# EAGLE board 0606_RGB_Clock (EAGLE 5.11)
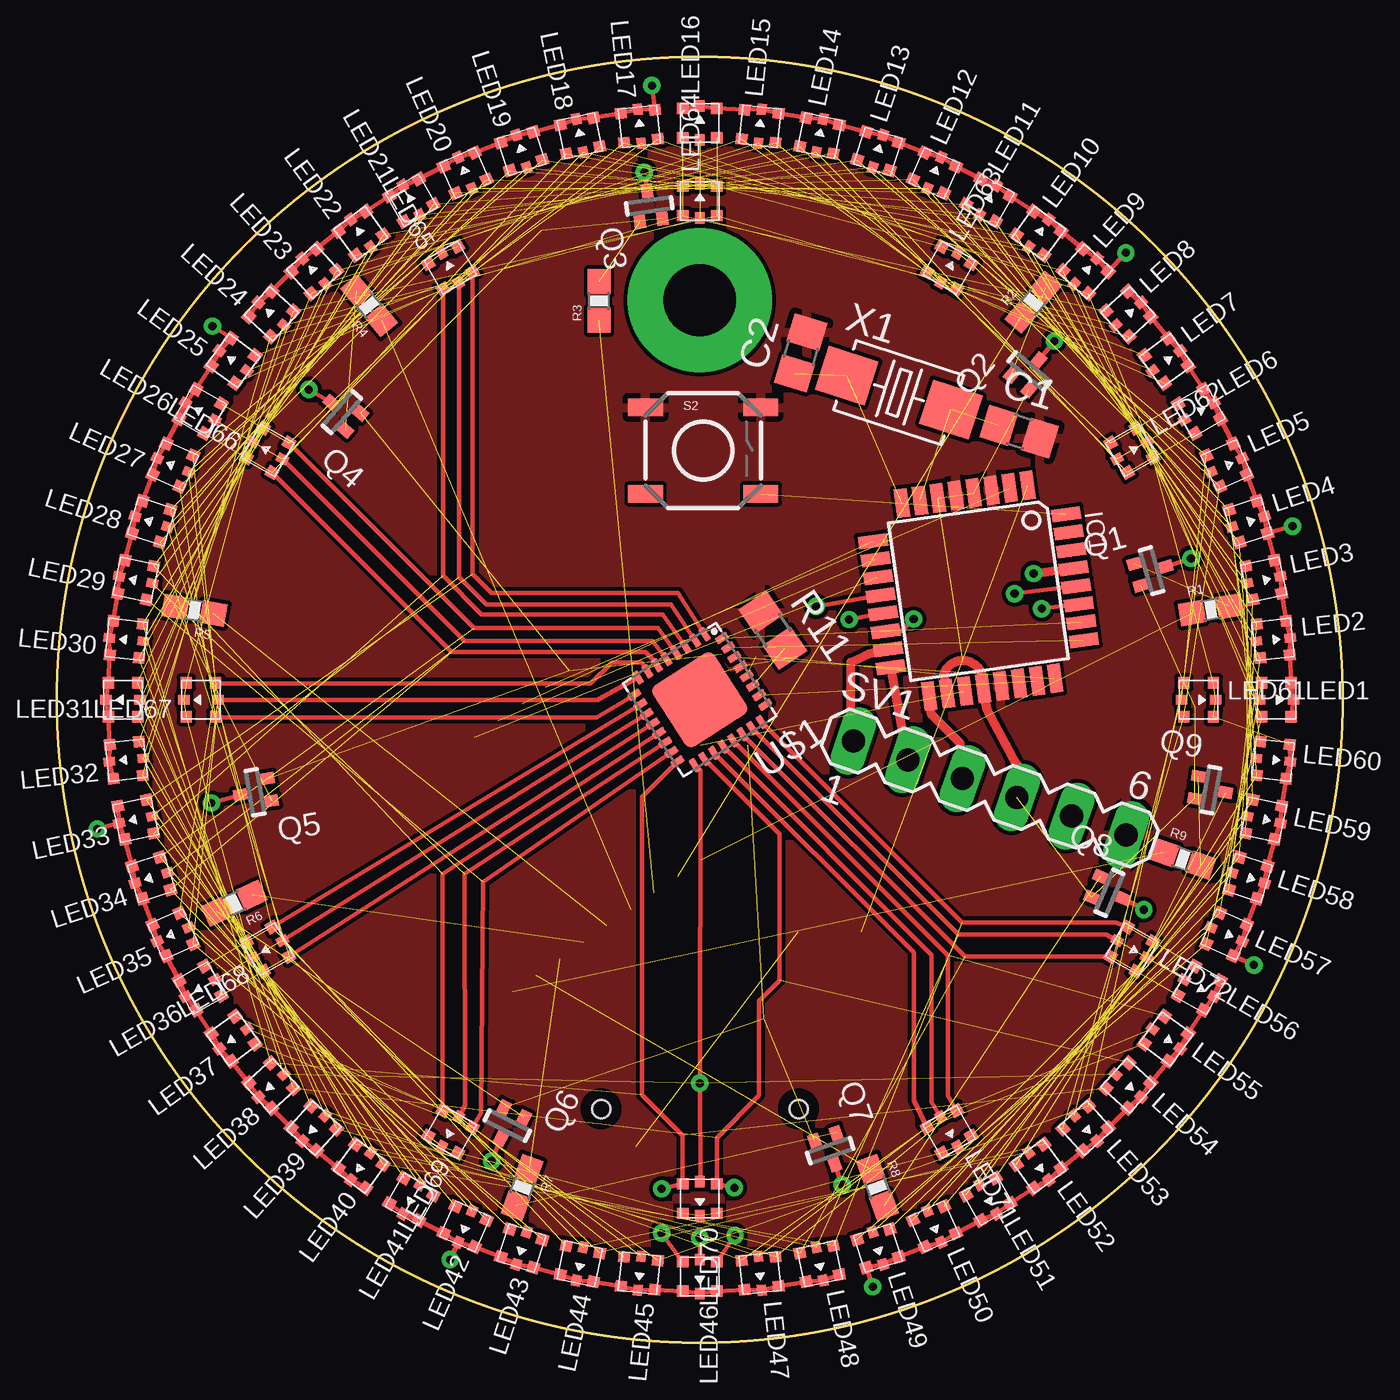
[diagram p0: board, top side]
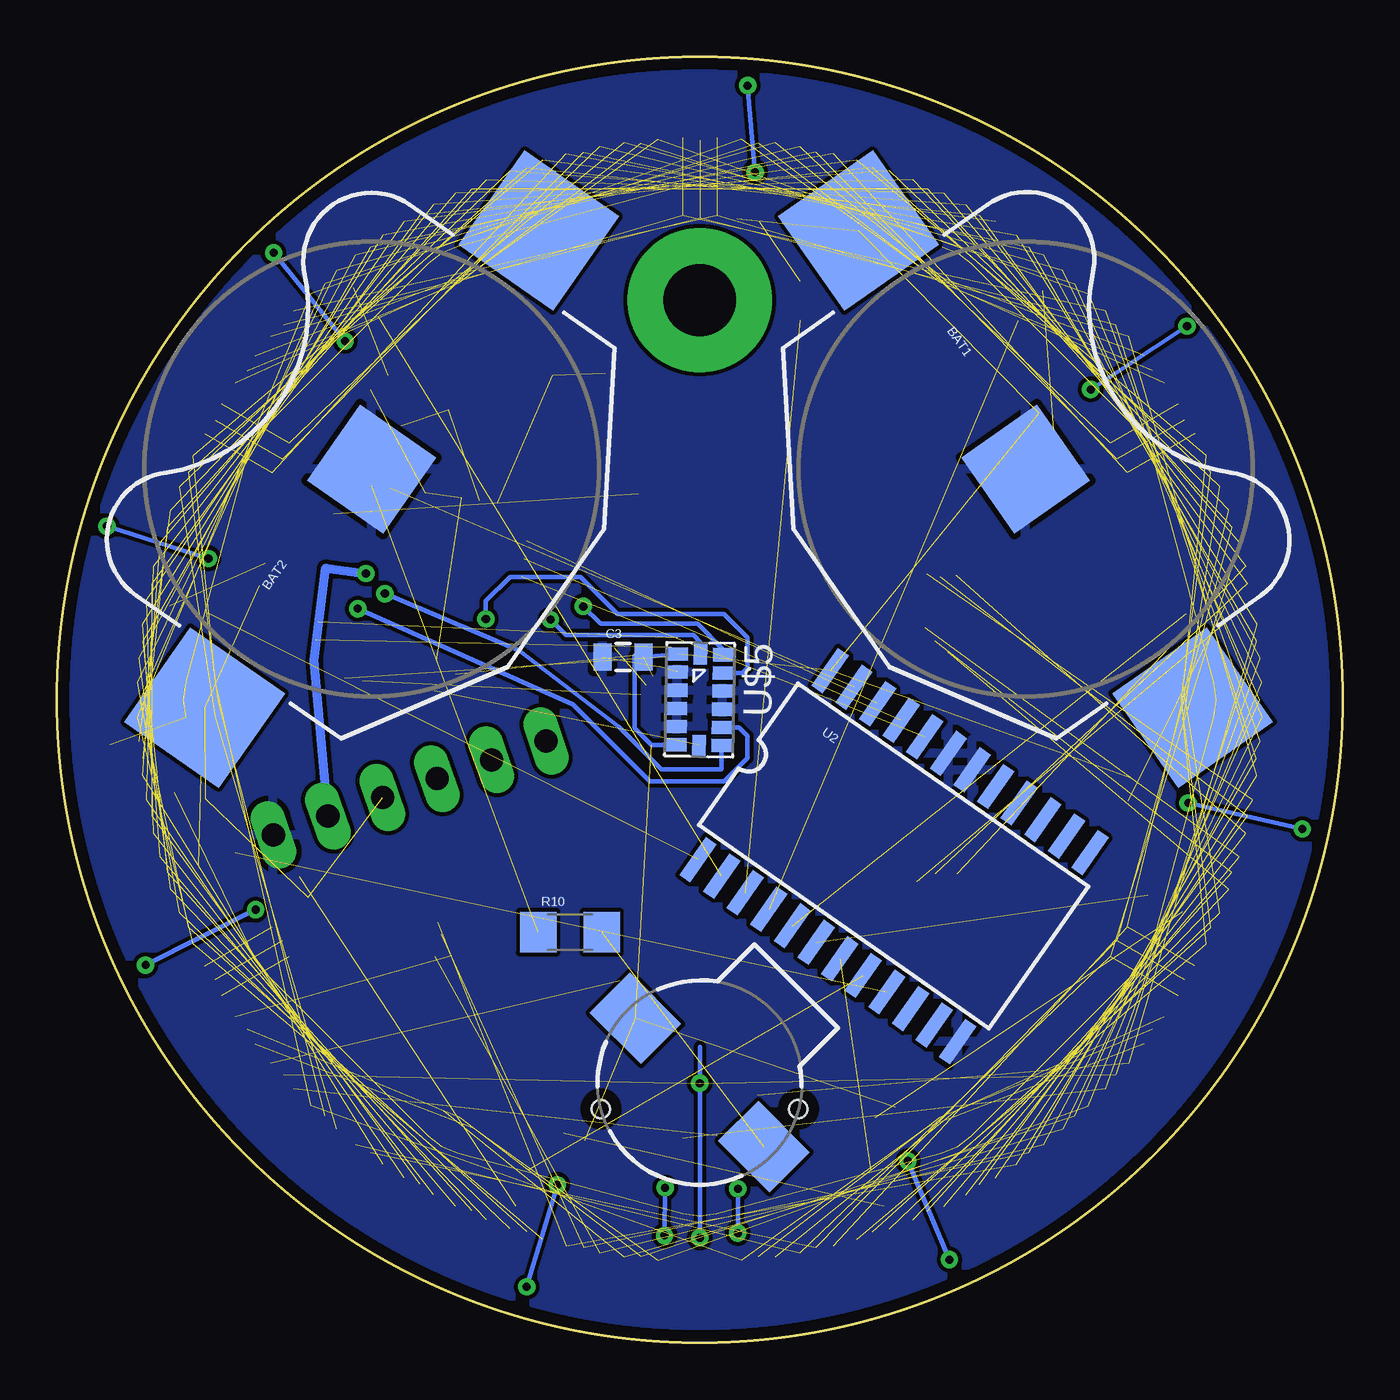
[diagram p1: board, bottom side, seen from below]

Size 56.64 x 56.64 mm. Coordinates in mm from the lower left corner, seen from the top.
Outline: circle at 28.32,28.32 radius 28.32
Copper layers (1*16): Top 0.0356mm / dielectric 1.5011mm / Bottom 0.0356mm
Design rules "SilverCircuits": minimum track width 7mil, minimum drill 14mil, track to track 7mil, track to pad 7mil, pad to pad 7mil, via to via 7mil, smd to smd 0mil, copper to edge 20mil, drill to drill 8mil, minimum pad ring 10mil, minimum via ring 8mil, stop-mask expansion 4mil, vias tented up to drill 0mil, thermal gap 10mil
Net classes: 0 default: width 0.254 mm

## Footprints (pad centres in the part's own frame; a part is rotated, then mirrored left to right if it is on the bottom)
BATTCON_20MM = smd 5.08 x 5.08: 1 -12.827,0; 3 12.827,0 | smd 4.064 x 4.064: 2 0,0
C0805 = smd 1.3 x 1.5: 1 -0.95,0; 2 0.95,0
0805 = smd 0.8 x 1.2: 1 -0.9,0; 2 0.9,0
TQFP32-08 = smd 1.27 x 0.559: 1 -4.293,2.8; 2 -4.293,2; 3 -4.293,1.2; 4 -4.293,0.4; 5 -4.293,-0.4; 6 -4.293,-1.2; 7 -4.293,-2; 8 -4.293,-2.8; 17 4.293,-2.8; 18 4.293,-2; 19 4.293,-1.2; 20 4.293,-0.4; 21 4.293,0.4; 22 4.293,1.2; 23 4.293,2; 24 4.293,2.8 | smd 0.559 x 1.27: 9 -2.8,-4.293; 10 -2,-4.293; 11 -1.2,-4.293; 12 -0.4,-4.293; 13 0.4,-4.293; 14 1.2,-4.293; 15 2,-4.293; 16 2.8,-4.293; 25 2.8,4.293; 26 2,4.293; 27 1.2,4.293; 28 0.4,4.293; 29 -0.4,4.293; 30 -1.2,4.293; 31 -2,4.293; 32 -2.8,4.293
0606_LED = smd 0.5 x 0.5: P$1 -0.75,-0.65; P$3 0.75,-0.65; P$4 0.75,0.65; P$6 -0.75,0.65 | smd 0.4 x 0.5: P$2 0,-0.75; P$5 0,0.75
SOT416 = smd 0.6 x 0.5: 1 -0.65,0; 2 0.65,-0.5; 3 0.65,0.5
SPARKFUN_0603-RES = smd 1.1 x 1: 1 -0.85,0; 2 0.85,0
1206 = smd 1.6 x 1.8: 1 -1.4,0; 2 1.4,0
R0805 = smd 1.3 x 1.5: 1 -0.95,0; 2 0.95,0
TACTILE_SWITCH_SMD = smd 1.524 x 0.762: 1 -2.54,1.905; 2 2.54,1.905; 3 -2.54,-1.905; 4 2.54,-1.905
BUZZER-CCV = smd 3.2 x 2.5: + 4,0; - -4,0 | hole 0.8: -3.9,-2.25; 2.25,3.9
MA06-1 = drill 1.016 long: 1 -6.35,0; 2 -3.81,0; 3 -1.27,0; 4 1.27,0; 5 3.81,0; 6 6.35,0
SO-24DW = smd 0.584 x 2.032: 1 -6.35,-5.08; 2 -5.08,-5.08; 3 -3.81,-5.08; 4 -2.54,-5.08; 5 -1.27,-5.08; 6 0,-5.08; 7 1.27,-5.08; 8 2.54,-5.08; 9 3.81,-5.08; 10 5.08,-5.08; 11 6.35,-5.08; 12 7.62,-5.08; 13 7.62,5.08; 14 6.35,5.08; 15 5.08,5.08; 16 3.81,5.08; 17 2.54,5.08; 18 1.27,5.08; 19 0,5.08; 20 -1.27,5.08; 21 -2.54,5.08; 22 -3.81,5.08; 23 -5.08,5.08; 24 -6.35,5.08
QFN32 = smd 0.3 x 0.6: 1 -1.75,-2.3; 2 -1.25,-2.3; 3 -0.75,-2.3; 4 -0.25,-2.3; 5 0.25,-2.3; 6 0.75,-2.3; 7 1.25,-2.3; 8 1.75,-2.3; 17 1.75,2.3; 18 1.25,2.3; 19 0.75,2.3; 20 0.25,2.3; 21 -0.25,2.3; 22 -0.75,2.3; 23 -1.25,2.3; 24 -1.75,2.3 | smd 0.6 x 0.3: 9 2.3,-1.75; 10 2.3,-1.25; 11 2.3,-0.75; 12 2.3,-0.25; 13 2.3,0.25; 14 2.3,0.75; 15 2.3,1.25; 16 2.3,1.75; 25 -2.3,1.75; 26 -2.3,1.25; 27 -2.3,0.75; 28 -2.3,0.25; 29 -2.3,-0.25; 30 -2.3,-0.75; 31 -2.3,-1.25; 32 -2.3,-1.75 | smd 3.2 x 3.2: EXP 0,0
LGA-14 = smd 0.6 x 0.9: 1 -2,-1; 2 -1.2,-1; 3 -0.4,-1; 4 0.4,-1; 5 1.2,-1; 6 2,-1; 8 2,1; 9 1.2,1; 10 0.4,1; 11 -0.4,1; 12 -1.2,1; 13 -2,1 | smd 0.9 x 0.6: 7 2,0; 14 -2,0
5032 = smd 2.286 x 2.032: 1 -2.413,0; 2 2.413,0

## Placement (x,y rotation side)
BAT1  [BATTCON_20MM]  13.97,38.48 305 bottom
BAT2  [BATTCON_20MM]  42.77,38.48 55 bottom
C1  [C0805]  42.39,40.13 343 top
C2  [C0805]  32.77,43.6 73 top
C3  [0805]  31.7,30.2 0 bottom
IC1  MEGA8-AI  [TQFP32-08]  40.6,33.12 278 top
LED1  [0606_LED]  53.72,28.32 270 top
LED2  [0606_LED]  53.58,30.98 276 top
LED3  [0606_LED]  53.16,33.6 282 top
LED4  [0606_LED]  52.48,36.17 288 top
LED5  [0606_LED]  51.52,38.65 294 top
LED6  [0606_LED]  50.32,41.02 300 top
LED7  [0606_LED]  48.87,43.25 306 top
LED8  [0606_LED]  47.2,45.32 312 top
LED9  [0606_LED]  45.32,47.2 318 top
LED10  [0606_LED]  43.25,48.87 324 top
LED11  [0606_LED]  41.02,50.32 330 top
LED12  [0606_LED]  38.65,51.52 336 top
LED13  [0606_LED]  36.17,52.48 342 top
LED14  [0606_LED]  33.6,53.16 348 top
LED15  [0606_LED]  30.98,53.58 354 top
LED16  [0606_LED]  28.32,53.72 0 top
LED17  [0606_LED]  25.67,53.58 6 top
LED18  [0606_LED]  23.04,53.16 12 top
LED19  [0606_LED]  20.47,52.48 18 top
LED20  [0606_LED]  17.99,51.52 24 top
LED21  [0606_LED]  15.62,50.32 30 top
LED22  [0606_LED]  13.39,48.87 36 top
LED23  [0606_LED]  11.33,47.2 42 top
LED24  [0606_LED]  9.45,45.32 48 top
LED25  [0606_LED]  7.77,43.25 54 top
LED26  [0606_LED]  6.32,41.02 60 top
LED27  [0606_LED]  5.12,38.65 66 top
LED28  [0606_LED]  4.16,36.17 72 top
LED29  [0606_LED]  3.48,33.6 78 top
LED30  [0606_LED]  3.06,30.98 84 top
LED31  [0606_LED]  2.92,28.32 90 top
LED32  [0606_LED]  3.06,25.67 96 top
LED33  [0606_LED]  3.48,23.04 102 top
LED34  [0606_LED]  4.16,20.47 108 top
LED35  [0606_LED]  5.12,17.99 114 top
LED36  [0606_LED]  6.32,15.62 120 top
LED37  [0606_LED]  7.77,13.39 126 top
LED38  [0606_LED]  9.45,11.33 132 top
LED39  [0606_LED]  11.33,9.45 138 top
LED40  [0606_LED]  13.39,7.77 144 top
LED41  [0606_LED]  15.62,6.32 150 top
LED42  [0606_LED]  17.99,5.12 156 top
LED43  [0606_LED]  20.47,4.16 162 top
LED44  [0606_LED]  23.04,3.48 168 top
LED45  [0606_LED]  25.67,3.06 174 top
LED46  [0606_LED]  28.32,2.92 180 top
LED47  [0606_LED]  30.98,3.06 186 top
LED48  [0606_LED]  33.6,3.48 192 top
LED49  [0606_LED]  36.17,4.16 198 top
LED50  [0606_LED]  38.65,5.12 204 top
LED51  [0606_LED]  41.02,6.32 210 top
LED52  [0606_LED]  43.25,7.77 216 top
LED53  [0606_LED]  45.32,9.45 222 top
LED54  [0606_LED]  47.2,11.33 228 top
LED55  [0606_LED]  48.87,13.39 234 top
LED56  [0606_LED]  50.32,15.62 240 top
LED57  [0606_LED]  51.52,17.99 246 top
LED58  [0606_LED]  52.48,20.47 252 top
LED59  [0606_LED]  53.16,23.04 258 top
LED60  [0606_LED]  53.58,25.67 264 top
LED61  [0606_LED]  50.29,28.32 270 top
LED62  [0606_LED]  47.35,39.31 300 top
LED63  [0606_LED]  39.31,47.35 330 top
LED64  [0606_LED]  28.32,50.29 0 top
LED65  [0606_LED]  17.34,47.35 30 top
LED66  [0606_LED]  9.29,39.31 60 top
LED67  [0606_LED]  6.35,28.32 90 top
LED68  [0606_LED]  9.29,17.34 120 top
LED69  [0606_LED]  17.34,9.29 150 top
LED70  [0606_LED]  28.32,6.35 180 top
LED71  [0606_LED]  39.31,9.29 210 top
LED72  [0606_LED]  47.35,17.34 240 top
Q1  BC857AT115  [SOT416]  48.22,34.01 196 top
Q2  BC857AT115  [SOT416]  42.84,42.79 230 top
Q3  BC857AT115  [SOT416]  26.09,50.08 278 top
Q4  BC857AT115  [SOT416]  12.56,41 319 top
Q5  BC857AT115  [SOT416]  8.73,24.25 10 top
Q6  BC857AT115  [SOT416]  19.85,9.57 63 top
Q7  BC857AT115  [SOT416]  34.06,8.46 109 top
Q8  BC857AT115  [SOT416]  46.37,19.83 157 top
Q9  BC857AT115  [SOT416]  50.83,24.35 170 top
R1  620  [SPARKFUN_0603-RES]  50.83,32.29 10 top
R2  620  [SPARKFUN_0603-RES]  43.01,45.83 50 top
R3  620  [SPARKFUN_0603-RES]  23.89,45.88 90 top
R4  620  [SPARKFUN_0603-RES]  13.75,45.68 130 top
R5  620  [SPARKFUN_0603-RES]  6.06,32.27 170 top
R6  620  [SPARKFUN_0603-RES]  7.81,19.35 205 top
R7  620  [SPARKFUN_0603-RES]  20.5,6.84 250 top
R8  620  [SPARKFUN_0603-RES]  36.14,6.84 290 top
R9  620  [SPARKFUN_0603-RES]  49.59,21.31 341 top
R10  [1206]  34.04,18.08 0 bottom
R11  [R0805]  31.54,31.38 304 top
S2  [TACTILE_SWITCH_SMD]  28.47,39.29 0 top
SG1  [BUZZER-CCV]  28.32,11.46 135 bottom
SV1  [MA06-1]  41.1,24.43 341 top
U2  CD74HC154M  [SO-24DW]  20.28,21.8 325 bottom
U$1  TLC5947  [QFN32]  28.32,28.32 213 top
U$5  MMA7455L  [LGA-14]  28.32,28.32 269 bottom
X1  [5032]  37.09,41.85 342 top

## Library data of the parts
BAT1 BAT2 C3 R10 S2 SG1 U2 = SparkFun
C1 C2 R11 = rcl
IC1 = atmel
LED1-LED72 U$1 = lil_rgb
Q1-Q9 = zetex
R1-R9 = Nullspace
SV1 = NSL
U$5 = MMA7455Lbreakoutboard-v1a
X1 = NSL_MiniQuad

## Nets
!CS: IC1.19 U$5.7
COL1: LED1.P$1 LED9.P$1 LED17.P$1 LED25.P$1 LED33.P$1 LED41.P$1 LED49.P$1 LED57.P$1 LED65.P$1 U$1.3
COL2: LED1.P$2 LED9.P$2 LED17.P$2 LED25.P$2 LED33.P$2 LED41.P$2 LED49.P$2 LED57.P$2 LED65.P$2 U$1.2
COL3: LED1.P$3 LED9.P$3 LED17.P$3 LED25.P$3 LED33.P$3 LED41.P$3 LED49.P$3 LED57.P$3 LED65.P$3 U$1.1
COL4: LED2.P$1 LED10.P$1 LED18.P$1 LED26.P$1 LED34.P$1 LED42.P$1 LED50.P$1 LED58.P$1 LED66.P$1 U$1.6
COL5: LED2.P$2 LED10.P$2 LED18.P$2 LED26.P$2 LED34.P$2 LED42.P$2 LED50.P$2 LED58.P$2 LED66.P$2 U$1.5
COL6: LED2.P$3 LED10.P$3 LED18.P$3 LED26.P$3 LED34.P$3 LED42.P$3 LED50.P$3 LED58.P$3 LED66.P$3 U$1.4
COL7: LED3.P$1 LED11.P$1 LED19.P$1 LED27.P$1 LED35.P$1 LED43.P$1 LED51.P$1 LED59.P$1 LED67.P$1 U$1.9
COL8: LED3.P$2 LED11.P$2 LED19.P$2 LED27.P$2 LED35.P$2 LED43.P$2 LED51.P$2 LED59.P$2 LED67.P$2 U$1.8
COL9: LED3.P$3 LED11.P$3 LED19.P$3 LED27.P$3 LED35.P$3 LED43.P$3 LED51.P$3 LED59.P$3 LED67.P$3 U$1.7
COL10: LED4.P$1 LED12.P$1 LED20.P$1 LED28.P$1 LED36.P$1 LED44.P$1 LED52.P$1 LED60.P$1 LED68.P$1 U$1.12
COL11: LED4.P$2 LED12.P$2 LED20.P$2 LED28.P$2 LED36.P$2 LED44.P$2 LED52.P$2 LED60.P$2 LED68.P$2 U$1.11
COL12: LED4.P$3 LED12.P$3 LED20.P$3 LED28.P$3 LED36.P$3 LED44.P$3 LED52.P$3 LED60.P$3 LED68.P$3 U$1.10
COL13: LED5.P$1 LED13.P$1 LED21.P$1 LED29.P$1 LED37.P$1 LED45.P$1 LED53.P$1 LED61.P$1 LED69.P$1 U$1.15
COL14: LED5.P$2 LED13.P$2 LED21.P$2 LED29.P$2 LED37.P$2 LED45.P$2 LED53.P$2 LED61.P$2 LED69.P$2 U$1.14
COL15: LED5.P$3 LED13.P$3 LED21.P$3 LED29.P$3 LED37.P$3 LED45.P$3 LED53.P$3 LED61.P$3 LED69.P$3 U$1.13
COL16: LED6.P$1 LED14.P$1 LED22.P$1 LED30.P$1 LED38.P$1 LED46.P$1 LED54.P$1 LED62.P$1 LED70.P$1 U$1.18
COL17: LED6.P$2 LED14.P$2 LED22.P$2 LED30.P$2 LED38.P$2 LED46.P$2 LED54.P$2 LED62.P$2 LED70.P$2 U$1.17
COL18: LED6.P$3 LED14.P$3 LED22.P$3 LED30.P$3 LED38.P$3 LED46.P$3 LED54.P$3 LED62.P$3 LED70.P$3 U$1.16
COL19: LED7.P$1 LED15.P$1 LED23.P$1 LED31.P$1 LED39.P$1 LED47.P$1 LED55.P$1 LED63.P$1 LED71.P$1 U$1.21
COL20: LED7.P$2 LED15.P$2 LED23.P$2 LED31.P$2 LED39.P$2 LED47.P$2 LED55.P$2 LED63.P$2 LED71.P$2 U$1.20
COL21: LED7.P$3 LED15.P$3 LED23.P$3 LED31.P$3 LED39.P$3 LED47.P$3 LED55.P$3 LED63.P$3 LED71.P$3 U$1.19
COL22: LED8.P$1 LED16.P$1 LED24.P$1 LED32.P$1 LED40.P$1 LED48.P$1 LED56.P$1 LED64.P$1 LED72.P$1 U$1.24
COL23: LED8.P$2 LED16.P$2 LED24.P$2 LED32.P$2 LED40.P$2 LED48.P$2 LED56.P$2 LED64.P$2 LED72.P$2 U$1.23
COL24: LED8.P$3 LED16.P$3 LED24.P$3 LED32.P$3 LED40.P$3 LED48.P$3 LED56.P$3 LED64.P$3 LED72.P$3 U$1.22
GND: BAT1.2 BAT2.2 C1.2 C2.2 C3.1 IC1.3 IC1.5 IC1.21 R11.1 S2.1 S2.2 SV1.6 U2.12 U2.18 U2.19 U$1.29 U$5.2 U$5.3 U$5.4 U$5.5 U$5.10 U$5.11
INT1/DRDY: IC1.28 U$5.8
INT2: IC1.27 U$5.9
LINE1: LED1.P$4 LED1.P$5 LED1.P$6 LED2.P$4 LED2.P$5 LED2.P$6 LED3.P$4 LED3.P$5 LED3.P$6 LED4.P$4 LED4.P$5 LED4.P$6 LED5.P$4 LED5.P$5 LED5.P$6 LED6.P$4 LED6.P$5 LED6.P$6 LED7.P$4 LED7.P$5 LED7.P$6 LED8.P$4 LED8.P$5 LED8.P$6 Q1.1
LINE2: LED9.P$4 LED9.P$5 LED9.P$6 LED10.P$4 LED10.P$5 LED10.P$6 LED11.P$4 LED11.P$5 LED11.P$6 LED12.P$4 LED12.P$5 LED12.P$6 LED13.P$4 LED13.P$5 LED13.P$6 LED14.P$4 LED14.P$5 LED14.P$6 LED15.P$4 LED15.P$5 LED15.P$6 LED16.P$4 LED16.P$5 LED16.P$6 Q2.1
LINE3: LED17.P$4 LED17.P$5 LED17.P$6 LED18.P$4 LED18.P$5 LED18.P$6 LED19.P$4 LED19.P$5 LED19.P$6 LED20.P$4 LED20.P$5 LED20.P$6 LED21.P$4 LED21.P$5 LED21.P$6 LED22.P$4 LED22.P$5 LED22.P$6 LED23.P$4 LED23.P$5 LED23.P$6 LED24.P$4 LED24.P$5 LED24.P$6 Q3.1
LINE4: LED25.P$4 LED25.P$5 LED25.P$6 LED26.P$4 LED26.P$5 LED26.P$6 LED27.P$4 LED27.P$5 LED27.P$6 LED28.P$4 LED28.P$5 LED28.P$6 LED29.P$4 LED29.P$5 LED29.P$6 LED30.P$4 LED30.P$5 LED30.P$6 LED31.P$4 LED31.P$5 LED31.P$6 LED32.P$4 LED32.P$5 LED32.P$6 Q4.1
LINE5: LED33.P$4 LED33.P$5 LED33.P$6 LED34.P$4 LED34.P$5 LED34.P$6 LED35.P$4 LED35.P$5 LED35.P$6 LED36.P$4 LED36.P$5 LED36.P$6 LED37.P$4 LED37.P$5 LED37.P$6 LED38.P$4 LED38.P$5 LED38.P$6 LED39.P$4 LED39.P$5 LED39.P$6 LED40.P$4 LED40.P$5 LED40.P$6 Q5.1
LINE6: LED41.P$4 LED41.P$5 LED41.P$6 LED42.P$4 LED42.P$5 LED42.P$6 LED43.P$4 LED43.P$5 LED43.P$6 LED44.P$4 LED44.P$5 LED44.P$6 LED45.P$4 LED45.P$5 LED45.P$6 LED46.P$4 LED46.P$5 LED46.P$6 LED47.P$4 LED47.P$5 LED47.P$6 LED48.P$4 LED48.P$5 LED48.P$6 Q6.1
LINE7: LED49.P$4 LED49.P$5 LED49.P$6 LED50.P$4 LED50.P$5 LED50.P$6 LED51.P$4 LED51.P$5 LED51.P$6 LED52.P$4 LED52.P$5 LED52.P$6 LED53.P$4 LED53.P$5 LED53.P$6 LED54.P$4 LED54.P$5 LED54.P$6 LED55.P$4 LED55.P$5 LED55.P$6 LED56.P$4 LED56.P$5 LED56.P$6 Q7.1
LINE8: LED57.P$4 LED57.P$5 LED57.P$6 LED58.P$4 LED58.P$5 LED58.P$6 LED59.P$4 LED59.P$5 LED59.P$6 LED60.P$4 LED60.P$5 LED60.P$6 LED61.P$4 LED61.P$5 LED61.P$6 LED62.P$4 LED62.P$5 LED62.P$6 LED63.P$4 LED63.P$5 LED63.P$6 LED64.P$4 LED64.P$5 LED64.P$6 Q8.1
LINE9: LED65.P$4 LED65.P$5 LED65.P$6 LED66.P$4 LED66.P$5 LED66.P$6 LED67.P$4 LED67.P$5 LED67.P$6 LED68.P$4 LED68.P$5 LED68.P$6 LED69.P$4 LED69.P$5 LED69.P$6 LED70.P$4 LED70.P$5 LED70.P$6 LED71.P$4 LED71.P$5 LED71.P$6 LED72.P$4 LED72.P$5 LED72.P$6 Q9.1
MISO: IC1.16 SV1.2
MOSI: IC1.15 SV1.1
N$2: Q1.2 R1.2
N$5: R10.2 SG1.-
N$7: C1.1 IC1.7 X1.2
N$8: C2.1 IC1.8 X1.1
N$9: IC1.23 U$1.26
N$10: IC1.24 U$1.30
N$11: IC1.25 U$1.31
N$12: IC1.26 U$1.32
N$13: R11.2 U$1.27
N$34: Q2.2 R2.2
N$59: Q3.2 R3.2
N$60: Q6.2 R6.2
N$61: Q7.2 R7.2
N$62: Q8.2 R8.2
N$63: Q5.2 R5.2
N$84: Q4.2 R4.2
N$89: Q9.2 R9.2
PD2: IC1.32 S2.4
PD3: IC1.1 R10.1
PD4: IC1.2 U2.23
PD5: IC1.9 U2.22
PD6: IC1.10 U2.21
PD7: IC1.11 U2.20
ROW1: R1.1 U2.1
ROW2: R2.1 U2.2
ROW3: R3.1 U2.3
ROW4: R4.1 U2.4
ROW5: R5.1 U2.5
ROW6: R6.1 U2.6
ROW7: R7.1 U2.7
ROW8: R8.1 U2.8
ROW9: R9.1 U2.9
ROW10: U2.10
ROW11: U2.11
ROW12: U2.13
ROW13: U2.14
ROW14: U2.15
ROW15: U2.16
ROW16: U2.17
RST: IC1.29 SV1.5
SCK: IC1.17 SV1.3
SCL/SPC: IC1.13 U$5.14
SDA/SDI/SDO: IC1.12 U$5.13
SDO: IC1.14 U$5.12
VCC: BAT1.1 BAT2.1 C3.2 IC1.4 IC1.6 IC1.18 IC1.20 Q1.3 Q2.3 Q3.3 Q4.3 Q5.3 Q6.3 Q7.3 Q8.3 Q9.3 SG1.+ SV1.4 U2.24 U$1.28 U$5.1 U$5.6

## Tracks (layer width: path | path; a pad name or v marks a point on that pad's centre or on a via)
!CS  (1 unrouted)
COL1  (8 unrouted)
  Top 0.203: LED65.P$1 17.01,33.79 18.72,32.08 26.67,32.08 26.7,32.05 U$1.3
COL2  (8 unrouted)
  Top 0.203: LED65.P$2 17.71,33.73 18.92,32.51 27.05,32.51 U$1.2
COL3  (8 unrouted)
  Top 0.203: LED65.P$3 18.31,33.86 19.15,33.02 27.36,33.02 U$1.1
COL4  (8 unrouted)
  Top 0.203: LED66.P$1 17.38,30.43 25.93,30.43 26.44,29.92 U$1.6
COL5  (8 unrouted)
  Top 0.203: LED66.P$2 17.96,30.91 26.24,30.91 U$1.5
COL6  (8 unrouted)
  Top 0.203: LED66.P$3 18.39,31.47 26.49,31.47 U$1.4
COL7  (8 unrouted)
  Top 0.203: LED67.P$1 7.04,27.53 23.77,27.53 U$1.9
COL8  (8 unrouted)
  Top 0.203: LED67.P$2 23.85,28.32 23.88,28.35 U$1.8
COL9  (8 unrouted)
  Top 0.203: U$1.7 25.76,29.97 24.46,29.97 23.52,29.03 7.04,29.03 LED67.P$3
COL10  (8 unrouted)
  Top 0.203: U$1.12 LED68.P$1
COL11  (8 unrouted)
  Top 0.203: U$1.11 LED68.P$2
COL12  (8 unrouted)
  Top 0.203: U$1.10 LED68.P$3
COL13  (8 unrouted)
  Top 0.203: LED69.P$1 18.69,10.14 18.77,20.3 U$1.15
COL14  (8 unrouted)
  Top 0.203: LED69.P$2 17.98,10.46 17.96,20.65 U$1.14
COL15  (8 unrouted)
  Top 0.203: LED69.P$3 16.99,10.25 16.99,20.65 U$1.13
COL16  (via drill 0.36)  (7 unrouted)
  Top 0.203: U$1.18 31.83,22.41 31.83,15.95 30.94,15.06 30.94,10.9 29.07,9.03 LED70.P$1 v29.85,6.83 | v29.87,4.72 LED46.P$1
  Bottom 0.203: v29.85,6.83 v29.87,4.72
COL17  (via drill 0.36)  (7 unrouted)
  Top 0.203: U$1.17 28.35,25.2 v28.32,11.43 28.35,7.12 LED70.P$2 | v28.32,4.62 LED46.P$2
  Bottom 0.203: 28.32,13.03 v28.32,11.43 v28.32,4.62
COL18  (via drill 0.36)  (7 unrouted)
  Top 0.203: U$1.16 25.78,24.04 25.78,10.92 27.57,9.13 LED70.P$3 v26.65,6.78 | v26.65,4.83 LED46.P$3
  Bottom 0.203: v26.65,6.78 v26.65,4.83
COL19  (8 unrouted)
  Top 0.203: U$1.21 39.24,17.07 39.24,10.87 LED71.P$1
COL20  (8 unrouted)
  Top 0.203: U$1.20 38.53,17.09 38.53,10.62 LED71.P$2
COL21  (8 unrouted)
  Top 0.203: U$1.19 37.74,17.18 37.74,10.67 LED71.P$3
COL22  (8 unrouted)
  Top 0.203: U$1.24 39.87,18.52 46.63,18.52 LED72.P$1
COL23  (8 unrouted)
  Top 0.203: U$1.23 39.71,17.98 46.2,17.98 LED72.P$2
COL24  (8 unrouted)
  Top 0.203: U$1.22 39.99,17.01 LED72.P$3
FLAVAFLAV  (via drill 3.17 pad 6.35)
  other vias: 28.32,45.92
GND  (2 unrouted)
  pour Top: -6.38,59.41 -6.38,-2.16 63.73,-2.16 63.73,59.39 -6.3,59.39
  pour Bottom: -5.41,58.57 -5.41,58.45 62.92,58.45 62.92,-1.55 -5.77,-1.55 -5.77,58.47 -5.46,58.47
INT1/DRDY  (via drill 0.36)
  Top 0.203: v42.19,33 IC1.28
  Bottom 0.203: U$5.8 27.36,25.27 27.38,25.25 30,25.25 31.9,27.15 36.27,30.48 v42.19,33
INT2  (via drill 0.36)
  Top 0.203: v43.38,32.33 IC1.27
  Bottom 0.203: 27.28,26.92 27.28,27.04 U$5.9 26.6,27.1 26.21,26.72 26.21,25.76 27.25,24.71 30.51,24.71 33.91,28.12 v43.38,32.33
LINE1  (via drill 0.36)
  Top 0.203: LED8.P$6 LED8.P$5 LED8.P$4 LED7.P$6 LED7.P$5 LED7.P$4 LED6.P$6 LED6.P$5 LED6.P$4 LED5.P$6 LED5.P$5 LED5.P$4 LED4.P$6 LED4.P$5 LED4.P$4 | LED4.P$4 LED3.P$6 LED3.P$5 LED3.P$4 LED2.P$6 LED2.P$5 LED2.P$4 LED1.P$6 LED1.P$5 LED1.P$4 | LED4.P$4 v54.43,35.97 | v49.96,34.54 Q1.1
  Bottom 0.203: v54.43,35.97 v49.96,34.54
LINE2  (via drill 0.36)
  Top 0.203: LED16.P$6 LED16.P$5 LED16.P$4 LED15.P$6 LED15.P$5 LED15.P$4 LED14.P$6 LED14.P$5 LED14.P$4 LED13.P$6 LED13.P$5 LED13.P$4 LED12.P$6 LED12.P$5 LED12.P$4 LED11.P$6 LED11.P$5 LED11.P$4 LED10.P$6 LED10.P$5 LED10.P$4 LED9.P$6 LED9.P$5 LED9.P$4 v47.09,48.01 | v43.94,44.12 Q2.1
  Bottom 0.203: v47.09,48.01 v43.94,44.12
LINE3  (via drill 0.36)
  Top 0.203: LED24.P$6 LED24.P$5 LED24.P$4 LED23.P$6 LED23.P$5 LED23.P$4 LED22.P$6 LED22.P$5 LED22.P$4 LED21.P$6 LED21.P$5 LED21.P$4 LED20.P$6 LED20.P$5 LED20.P$4 LED19.P$6 LED19.P$5 LED19.P$4 LED18.P$6 LED18.P$5 LED18.P$4 LED17.P$6 LED17.P$5 LED17.P$4 v26.21,55.37 | v25.88,51.56 Q3.1
  Bottom 0.203: v26.21,55.37 v25.88,51.56
LINE4  (via drill 0.36)
  Top 0.203: LED32.P$6 LED32.P$5 LED32.P$4 LED31.P$6 LED31.P$5 LED31.P$4 LED30.P$6 LED30.P$5 LED30.P$4 LED29.P$6 LED29.P$5 LED29.P$4 LED28.P$6 LED28.P$5 LED28.P$4 LED27.P$6 LED27.P$5 LED27.P$4 LED26.P$6 LED26.P$5 LED26.P$4 LED25.P$6 LED25.P$5 LED25.P$4 v6.86,44.78 | Q4.1 v11.1,41.99
  Bottom 0.203: v11.1,41.99 v6.86,44.78
LINE5  (via drill 0.36)
  Top 0.203: LED40.P$6 LED40.P$5 LED40.P$4 LED39.P$6 LED39.P$5 LED39.P$4 LED38.P$6 LED38.P$5 LED38.P$4 LED37.P$6 LED37.P$5 LED37.P$4 LED36.P$6 LED36.P$5 LED36.P$4 LED35.P$6 LED35.P$5 LED35.P$4 LED34.P$6 LED34.P$5 LED34.P$4 LED33.P$6 LED33.P$5 | LED33.P$5 LED33.P$4 | Q5.1 v6.81,23.77 | v1.78,22.63 LED33.P$5
  Bottom 0.203: v6.81,23.77 v1.78,22.63
LINE6  (via drill 0.36)
  Top 0.203: LED48.P$6 LED48.P$5 LED48.P$4 LED47.P$6 LED47.P$5 LED47.P$4 LED46.P$6 LED46.P$5 LED46.P$4 LED45.P$6 LED45.P$5 LED45.P$4 LED44.P$6 LED44.P$5 LED44.P$4 LED43.P$6 LED43.P$5 LED43.P$4 LED42.P$6 LED42.P$5 | LED42.P$5 LED42.P$4 LED41.P$6 LED41.P$5 LED41.P$4 | v19.15,8 Q6.1 | LED42.P$5 v17.32,3.66
  Bottom 0.203: v17.32,3.66 v19.15,8
LINE7  (via drill 0.36)
  Top 0.203: LED56.P$6 LED56.P$5 LED56.P$4 LED55.P$6 LED55.P$5 LED55.P$4 LED54.P$6 LED54.P$5 LED54.P$4 LED53.P$6 LED53.P$5 LED53.P$4 LED52.P$6 LED52.P$5 LED52.P$4 LED51.P$6 LED51.P$5 LED51.P$4 LED50.P$6 LED50.P$5 LED50.P$4 LED49.P$6 LED49.P$5 LED49.P$4 v35.94,2.46 | v34.59,6.96 Q7.1
  Bottom 0.203: v35.94,2.46 v34.59,6.96
LINE8  (via drill 0.36)  (12 unrouted)
  Top 0.203: LED60.P$6 LED60.P$5 LED60.P$4 LED59.P$6 LED59.P$5 LED59.P$4 LED58.P$6 LED58.P$5 LED58.P$4 LED57.P$6 LED57.P$5 LED57.P$4 v52.73,16.64 | Q8.1 v47.88,19.08
  Bottom 0.203: v47.88,19.08 v52.73,16.64
LINE9  (24 unrouted)
MISO
  Top 0.406: SV1.2 IC1.16
MOSI
  Top 0.406: SV1.1 34.98,26.73 34.98,29.97 35.79,30.35 IC1.15
N$2  (1 unrouted)
N$5  (1 unrouted)
N$7  (2 unrouted)
N$8  (2 unrouted)
N$9  (1 unrouted)
N$10  (1 unrouted)
N$11  (1 unrouted)
N$12  (1 unrouted)
N$13  (1 unrouted)
N$34  (1 unrouted)
N$59  (1 unrouted)
N$60  (1 unrouted)
N$61  (1 unrouted)
N$62  (1 unrouted)
N$63  (1 unrouted)
N$84  (1 unrouted)
N$89  (1 unrouted)
PD2  (1 unrouted)
PD3  (1 unrouted)
PD4  (1 unrouted)
PD5  (1 unrouted)
PD6  (1 unrouted)
PD7  (1 unrouted)
ROW1  (1 unrouted)
ROW2  (1 unrouted)
ROW3  (1 unrouted)
ROW4  (1 unrouted)
ROW5  (1 unrouted)
ROW6  (1 unrouted)
ROW7  (1 unrouted)
ROW8  (1 unrouted)
ROW9  (1 unrouted)
RST  (via drill 0.36)
  Top 0.406: v43.03,33.88 IC1.29
  Bottom 0.406: SV1.5 45.31,30.05 IC1.29 v43.03,33.88
SCK
  Top 0.406: IC1.17 38.53,27.66 39.8,26.39 SV1.3
SCL/SPC  (via drill 0.36)
  Top 0.203: v34.9,31.85 IC1.13
  Bottom 0.203: U$5.14 28.29,30.85 28.6,31.17 34.21,31.17 v34.9,31.85
SDA/SDI/SDO  (via drill 0.36)
  Top 0.203: v33.45,32.44 35.79,32.84 IC1.12
  Bottom 0.203: U$5.13 27.29,30.54 28.42,31.67 32.69,31.67 v33.45,32.44
SDO  (via drill 0.36)
  Top 0.203: v37.74,31.88 37.21,31.34 IC1.14
  Bottom 0.203: U$5.12 27.34,29.46 27.38,29.46 27.36,29.49 26.44,29.49 26.21,29.72 26.21,31.06 27.25,32.11 31.95,32.11 33.58,33.73 36.68,33.73 37.74,32.66 v37.74,31.88
VCC  (17 unrouted)
  Top 0.406: SV1.4 42.29,25.45 41,27.86 IC1.20 40.8,29.16 arc90 39.9,30.05 arc72 39.06,29.44 IC1.18
  Bottom 0.203: U$5.6 30.45,26.34 31.19,27.08 31.19,30.26 C3.2 U$5.1